# Altium PCB lathe_pcb.PcbDoc
Units mm, origin at the board's own origin, x right, y up, seen from the top; angles counter-clockwise.
Board outline 99.95 x 69.09 mm, 2 copper layers (Top Layer, Ground); 55 components, 34 nets, 170 pads, 21 vias.
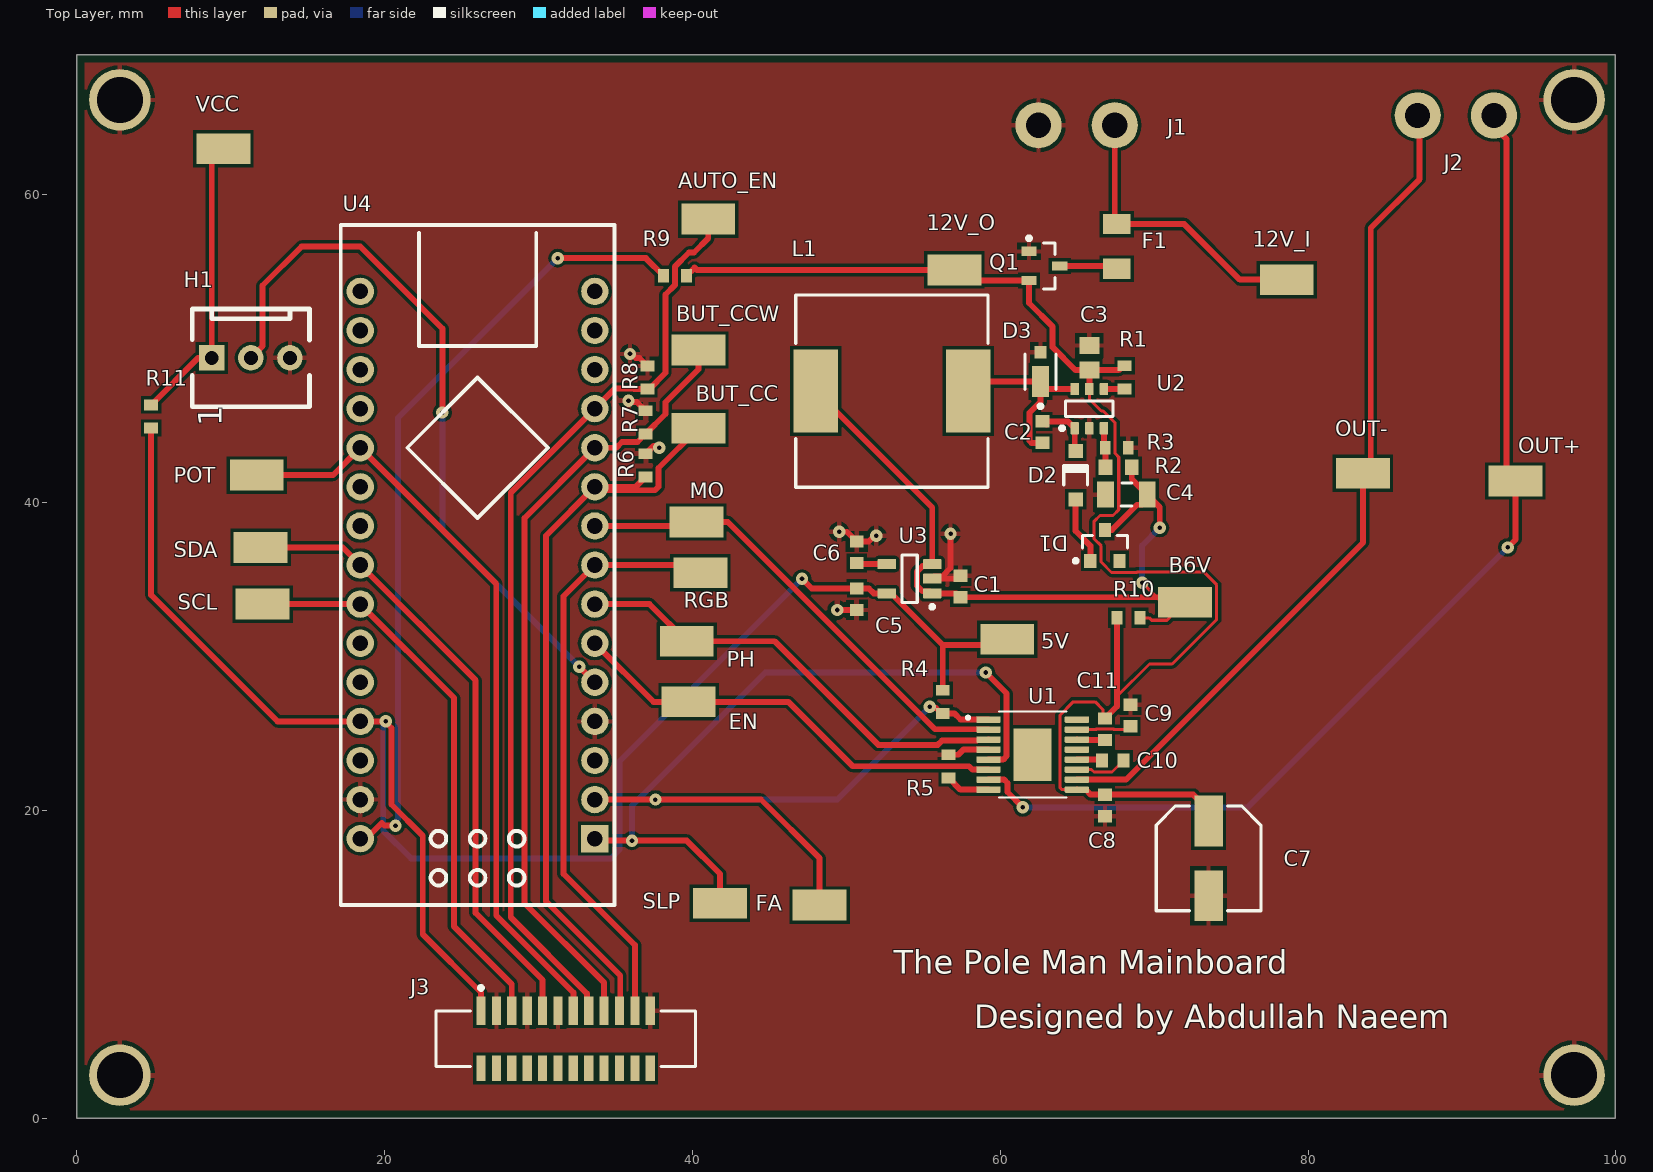
[diagram p0: Top Layer view]
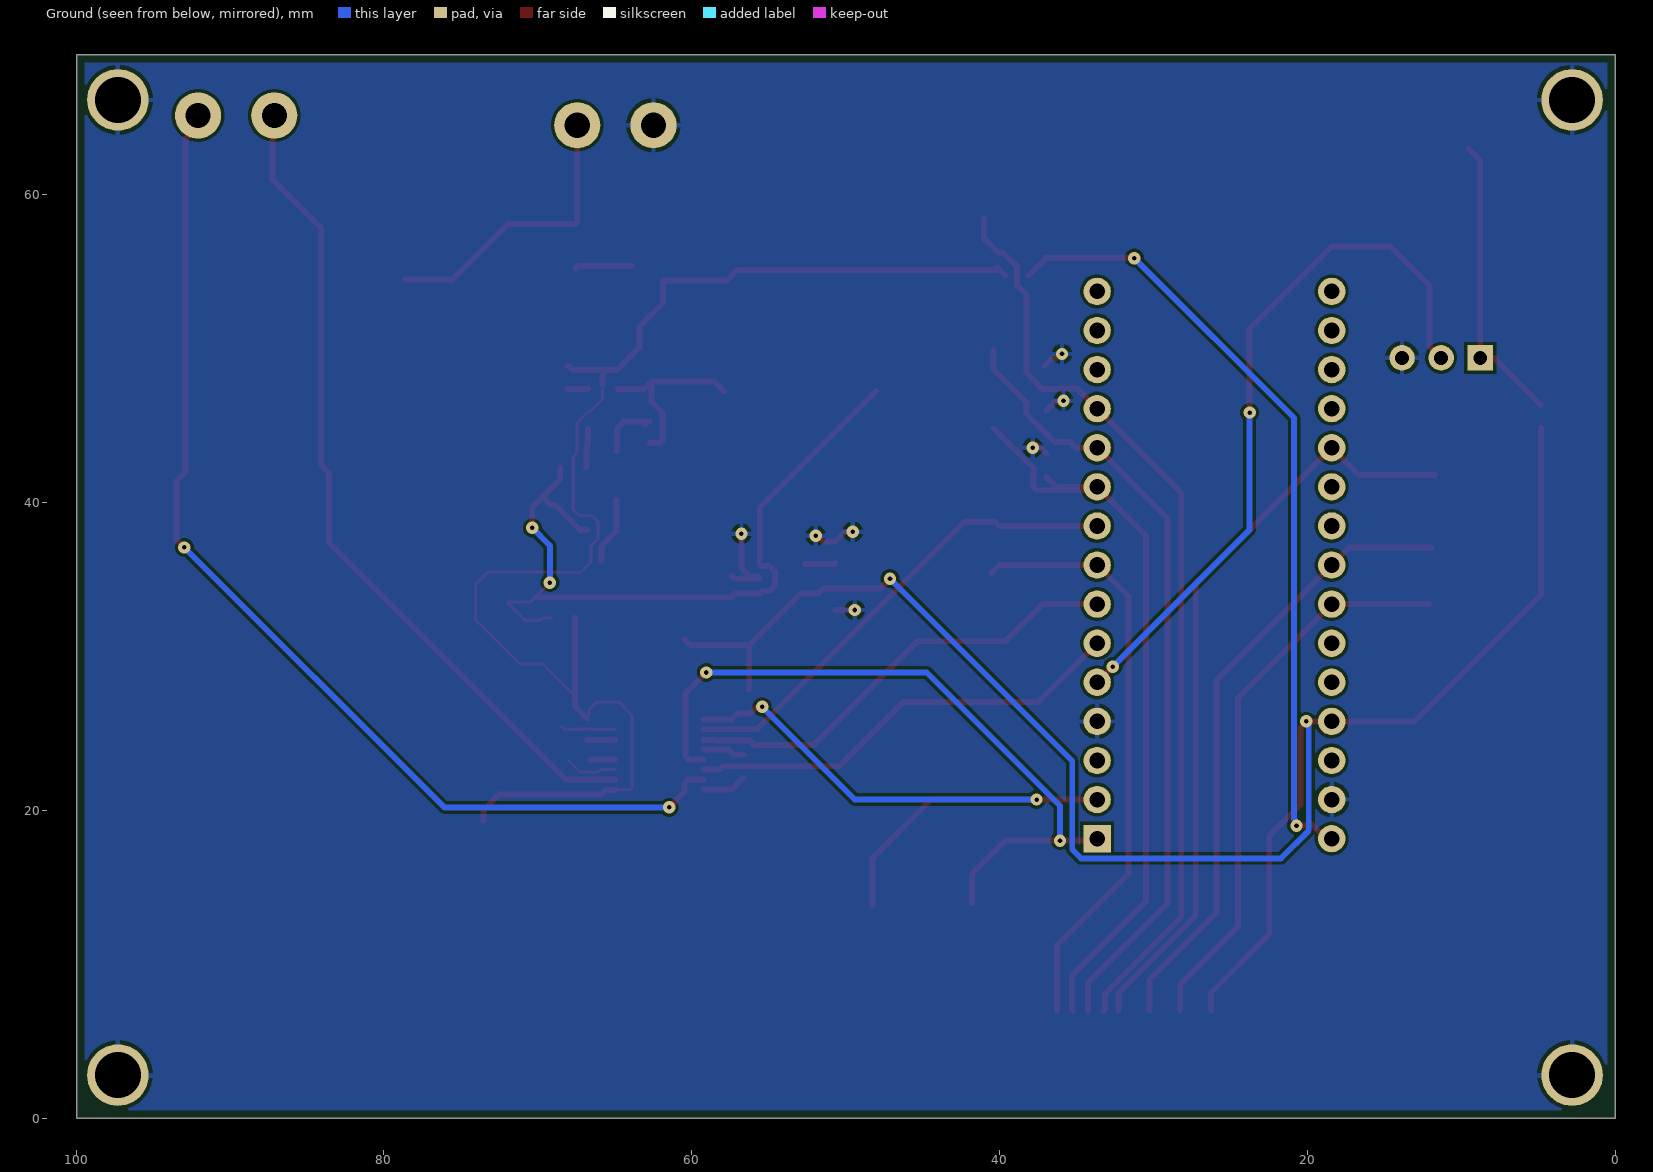
[diagram p1: Ground view, seen from below]

## Layer stack, top to bottom
Top Solder: solder mask 0.0102, Solder Resist, Dk 3.5
Top Layer: signal copper 0.009
Dielectric 1: dielectric 0.32, FR-4, Dk 4.8
Ground: signal copper 0.009
Bottom Solder: solder mask 0.0102, Solder Resist, Dk 3.5

## Board outline
0,0 0,69.088 99.949,69.088 99.949,0

## Design rules (kind name [scope] priority, off if disabled: settings)
BoardOutlineClearance [All] p1: gap=0.5 ignorepadtopadclearanceinfootprint=FALSE
Clearance GND_POLY [InNamedPolygon('GND')] p1: gap=0.254 ignorepadtopadclearanceinfootprint=FALSE
Clearance Min_Clearance_Circuit_Labs [All] p2: gap=0.2 ignorepadtopadclearanceinfootprint=FALSE
FanoutControl Fanout_BGA [IsBGA] p1 off: bgadir=Out bgaviamode=Centered fanoutstyle=Auto fanoutdirection=Alternating viagrid=0.025 // Fanout_BGA (Default Rule)
Height [All] p1: minheight=0 maxheight=50.8 prefheight=12.7
HoleSize [All] p1: absolutevalues=TRUE maxlimit=10 minlimit=0.3 maxpercent=80.000 minpercent=20.000
MinimumAnnularRing [All] p1: minimumring=0.1
MinimumSolderMaskSliver [All] p1: minsoldermaskwidth=0.102
NetAntennae [All] p1: netantennaetolerance=1
PolygonConnect [All] p1: connectstyle=Relief reliefconductorwidth=0.305 reliefentries=4 polygonreliefangle="90 Angle" airgapwidth=0.254
RoutingVias [All] p1: holewidth=0.5 width=1 viastyle="Through Hole" minholewidth=0.3 minwidth=0.8 maxholewidth=1 maxwidth=2
SMDNeckDown [All] p1 off: percent=50.000
SMDToCorner [All] p1: distance=98425
SMDToPlane [All] p1: distance=1968504
SilkToSolderMaskClearance SilkscreenOverComponentPads [IsPad] p1: minsilkscreentomaskgap=0.2 clearancetoexposedcopper=TRUE
SolderMaskExpansion [All] p1: expansion=0.102
ViasUnderSMD [All] p1: allowed=FALSE
Width [All] p1: maxlimit=2 minlimit=0.2 preferedwidth=0.3
24 further rules are at their usual default settings.

## Components (designator, comment, footprint, x,y, rotation, side; value= is the part's Value field where it differs from the comment)
5V "TP" TP_1206 60.452,31.115 r0 top
12V_I "TP" TP_1206 78.613,54.483 r0 top
12V_O "TP" TP_1206 57.023,55.118 r0 top
AUTO_EN "TP" TP_1206 41.021,58.42 r0 top
B6V "TP" TP_1206 72.009,33.528 r180 top
BUT_CC "TP" TP_1206 40.386,44.831 r0 top
BUT_CCW "TP" TP_1206 40.386,49.911 r0 top
C1 "1uF" CAPC1608L 57.404,34.544 r270 top
C2 "100nF" CAPC1608L 62.738,44.577 r270 top
C3 "10uF" CAPC2012L 65.786,49.403 r270 top
C4 "22uF" CAPC3216L 68.199,40.513 r0 top
C5 "2.2uF" CAPC1608L 50.673,33.717 r90 top
C6 "10nF" CAPC1608L 50.673,36.768 r270 top
C7 "100µF/25V" CAPAE6666X77M 73.533,16.879 r270 top
C8 "100nF" CAPC1608L 66.802,20.32 r90 top
C9 "220nF" CAPC1608L 68.453,26.162 r90 top
C10 "100nF" CAPC1608L 67.31,23.241 r180 top
C11 "100nF" CAPC1608L 66.802,25.273 r270 top
D1 "BZX84C4V3LT1G" ONSC-SOT-23-3-318-08_V 66.802,37.211 r90 top
D2 "1N4148W-7-F" DIOD-SOD123-2_V 64.897,41.783 r90 top
D3 "MSS1P3L-M3/89A" FP-96591-MFG 62.611,48.514 r90 top value=65pF
EN "TP" TP_1206 39.751,27.051 r0 top
F1 "1A" RESC3216N 67.564,56.642 r270 top value=2A
FA "TP" TP_1206 48.26,13.843 r0 top
H1 "3 Pin Molex KK Hdr" MOLEX_KK_3_HDR 8.763,49.403 r0 top
J1 "14 AWG" 14AWG_holes 67.437,64.516 r90 top
J2 "14 AWG" 14AWG_holes 92.075,65.151 r90 top
J3 "52610-1272" MOLX-52610-1272 31.758,5.11 r0 top
L1 "47.0 µH" WE-PD-L 52.959,47.244 r180 top
MO "TP" TP_1206 40.259,38.735 r0 top
OUT+ "TP" TP_1206 93.472,41.402 r0 top
OUT- "TP" TP_1206 83.566,41.91 r0 top
PH "TP" TP_1206 39.624,30.988 r0 top
POT "TP" TP_1206 11.684,41.783 r0 top
Q1 "SSM3J328R,LF" SOT23_L 62.865,55.372 r0 top
R1 "100K" RESC1608L 68.072,48.133 r90 top
R2 "47K" RESC1608N 67.691,42.291 r0 top
R3 "10K" RESC1608L 67.564,43.561 r180 top
R4 "10K" RESC1608L 56.261,27.051 r90 top
R5 "0R" RESC1608L 56.642,22.86 r270 top
R6 "10K" RESC1608L 36.957,42.418 r270 top
R7 "10K" RESC1608L 36.957,45.212 r270 top
R8 "10K" RESC1608L 37.084,48.121 r270 top
R9 "0R" RESC1608L 38.862,54.737 r0 top
R10 "0R" RESC1608L 68.326,32.512 r180 top
R11 "0R" RESC1608L 4.826,45.593 r270 top
RGB "TP" TP_1206 40.513,35.433 r0 top
SCL "TP" TP_1206 12.065,33.401 r0 top
SDA "TP" TP_1206 11.938,37.084 r0 top
SLP "TP" TP_1206 41.783,13.97 r0 top
U1 "DRV8800PWP" SOP65P640X120-17N 62.103,23.622 r0 top
U2 "LM2736YMK" DDC0006A_L 65.786,46.101 r90 top
U3 "LP2985-50DBVR" DBV0005A_M 54.102,35.052 r180 top
U4 "Arduino Nano" Arduino-nano 33.655,18.161 r180 top
VCC "TP" TP_1206 9.525,62.992 r0 top

## Footprints (in the part's own frame and the unit in brackets; to place one, negate y for a bottom-side part, rotate by r counter-clockwise, add the part's x,y. Pads: shape width x height; smd on the part's side, far side on the other; paste and mask are expansions set on the pad)
14AWG_holes [mm]
  round 3 hole 1.628: 1(0,0) 2(0,4.953)
Arduino-nano [mil]
  rect 70x70 hole 40: 1(0,0)
  round 70 hole 40: 2(0,-100) 3(0,-200) 4(0,-300) 5(0,-400) 6(0,-500) 7(0,-600) 8(0,-700) 9(0,-800) 10(0,-900) 11(0,-1000) 12(0,-1100) 13(0,-1200) 14(0,-1300) 15(0,-1400) 16(600,-1400) 17(600,-1300) 18(600,-1200) 19(600,-1100) 20(600,-1000) 21(600,-900) 22(600,-800) 23(600,-700) 24(600,-600) 25(600,-500) 26(600,-400) 27(600,-300) 28(600,-200) 29(600,-100) 30(600,0)
  silkscreen extent -50,-1570 650,170, body extent -50,-1450 650,50, height 10
CAPAE6666X77M [mm] "Aluminum Electrolytic Capacitor, Body 6.60x6.60x7.70mm, IPC Low Density"
  rect 3.3x1.85 smd: 1(2.425,0) 2(-2.425,0)
  silkscreen extent -3.4,-3.4 3.4,3.4, body extent -3.4,-3.4 3.4,3.4, height 7.7
CAPC1608L [mm] "Chip Capacitor, Body 1.6x0.8mm, IPC High Density"
  rect 0.8x0.9 smd: 1(-0.7,0) 2(0.7,0)
  body extent -0.87,-0.48 0.87,0.48, height 0.85
CAPC2012L [mm] "Chip Capacitor, Body 2.0x1.3mm, IPC High Density"
  rect 1.1x1.3 smd: 1(-0.8,0) 2(0.8,0)
  body extent -1.1,-0.72 1.1,0.72, height 1.1
CAPC3216L [mm] "Chip Capacitor, Body 3.2x1.6mm, IPC High Density"
  rect 1.1x1.7 smd: 1(-1.35,0) 2(1.35,0)
  silkscreen extent -0.35,-0.75 0.35,0.75, body extent -1.7,-0.9 1.7,0.9, height 1.35
DBV0005A_M [mm] "SOT23, 5-Leads, Body 3.05x1.75mm, Pitch 0.95mm, IPC Low Density"
  rrect15% 1.2x0.65 smd: 1(-1.475,0.95) 2(-1.475,0) 3(-1.475,-0.95) 4(1.475,-0.95) 5(1.475,0.95)
  silkscreen extent -1.6,-1.55 0.5,1.95, body extent -1.42,-1.46 1.42,1.46, height 1.08
DDC0006A_L [mm] "SOT23, 6-Leads, Body 3.05x1.75mm, Pitch 0.95mm, IPC High Density"
  rrect18% 0.8x0.55 smd: 1(-1.275,0.95) 2(-1.275,0) 3(-1.275,-0.95) 4(1.275,-0.95) 5(1.275,0) 6(1.275,0.95)
  silkscreen extent -1.4,-1.55 0.5,1.9, body extent -1.43,-1.48 1.43,1.49, height 0.9
DIOD-SOD123-2_V [mm] "SOD123, 2-Leads, Body 2.7x1.55mm, Height 1.45mm"
  rect 0.9x0.95 smd: 1(-1.575,0) 2(1.575,0)
  silkscreen extent -0.64,-0.82 0.64,0.77, body extent -1.35,-0.77 1.35,0.77, height 1.45
FP-96591-MFG [mm]
  rect 2x1.1 smd paste+0 mask+0: 1(-0.65,0)
  rect 0.8x0.8 smd paste+0 mask+0: 2(1.25,0)
  silkscreen extent -2.37,-1 1.15,1, body extent -1.75,-0.8 1.75,0.8, height 0.25
MOLEX_KK_3_HDR [mil] "MOLEX_KK_3_HDR"
  rect 65x65 hole 35.43: 1(0,0)
  round 65 hole 35.43: 2(100,0) 3(200,0)
  silkscreen extent -50,-125 250,125, body extent -50,-114 250,114, height 461
MOLX-52610-1272 [mm] "FPC Connector, 12-Leads, Vertical, Pitch 1.0 mm, Mated Height 5.75 mm, SMT"
  rect 0.6x1.85 smd: 1A(-5.5,1.875) 2A(-4.5,1.875) 3A(-3.5,1.875) 4A(-2.5,1.875) 5A(-1.5,1.875) 6A(-0.5,1.875) 7A(0.5,1.875) 8A(1.5,1.875) 9A(2.5,1.875) 10A(3.5,1.875) 11A(4.5,1.875) 12A(5.5,1.875)
  rect 0.6x1.65 smd: 1B(-5.5,-1.875) 2B(-4.5,-1.875) 3B(-3.5,-1.875) 4B(-2.5,-1.875) 5B(-1.5,-1.875) 6B(-0.5,-1.875) 7B(0.5,-1.875) 8B(1.5,-1.875) 9B(2.5,-1.875) 10B(3.5,-1.875) 11B(4.5,-1.875) 12B(5.5,-1.875)
  silkscreen extent -8.43,-1.75 8.43,3.47, body extent -9.3,-2.24 9.3,2.26, height 5.76
ONSC-SOT-23-3-318-08_V [mm] "SOT23, 3-Leads, Body 2.92x1.3mm, Pitch 0.95mm"
  rect 0.9x0.8 smd: 1(-1,0.95) 2(-1,-0.95) 3(1,0)
  silkscreen extent -1.12,-1.46 0.65,2.02, body extent -0.65,-1.46 0.65,1.46, height 1.11
RESC1608L [mm] "Chip Resistor, Body 1.6x0.8mm, IPC High Density"
  rect 0.7x0.9 smd: 1(-0.75,0) 2(0.75,0)
  body extent -0.85,-0.48 0.85,0.48, height 0.9
RESC1608N [mm] "Chip Resistor, Body 1.6x0.8mm, IPC Medium Density"
  rect 0.9x1 smd: 1(-0.85,0) 2(0.85,0)
  body extent -0.85,-0.48 0.85,0.48, height 0.6
RESC3216N [mm] "Chip Resistor, Body 3.2x1.6mm, IPC Medium Density"
  rect 1.3x1.8 smd: 1(-1.45,0) 2(1.45,0)
  body extent -1.68,-0.87 1.68,0.87, height 0.71
SOP65P640X120-17N [mm]
  rrect25% 1.57x0.41 smd: 1(-2.87,2.275) 2(-2.87,1.625) 3(-2.87,0.975) 4(-2.87,0.325) 5(-2.87,-0.325) 6(-2.87,-0.975) 7(-2.87,-1.625) 8(-2.87,-2.275) 9(2.87,-2.275) 10(2.87,-1.625) 11(2.87,-0.975) 12(2.87,-0.325) 13(2.87,0.325) 14(2.87,0.975) 15(2.87,1.625) 16(2.87,2.275)
  rect 2.48x3.4 smd paste-3: 17(0,0)
  silkscreen extent -4.3,-2.8 2.2,2.8
SOT23_L [mm] "SOT23, 3-Leads, Body 2.9x1.3mm, Pitch 0.95mm, Lead Span 2.3mm, IPC High Density"
  rect 1x0.6 smd: 1(-1,0.95) 2(-1,-0.95) 3(1,0)
  silkscreen extent -1.12,-1.5 0.7,1.92, body extent -0.7,-1.5 0.7,1.5, height 1.1
TP_1206 [mm] "Test Point Pad"
  rect 3.5x2 smd: 1(0,0)
  body extent -1.62,-0.85 1.63,0.8, height 2
WE-PD-L [mm] "SMD Inductor, 2-Leads, Body 12.0 x 12.0 mm"
  rect 2.9x5.4 smd: 1(-4.95,0) 2(4.95,0)
  silkscreen extent -6.25,-6.25 6.25,6.25, body extent -6,-6 6,6, height 5.98

## Part data
5V 12V_I 12V_O AUTO_EN B6V BUT_CC BUT_CCW EN FA MO OUT+ OUT- PH POT RGB SCL SDA SLP VCC: library part TP_1206, "Test-Point 3.3x1.6x2.1mm SMD", Manufacturer="Harwin Inc", Manufacturer Part Number=S1751-46R, Supplier Part Number 1=952-1478-2-ND, Mounting Type="Surface Mount", Storage Location=ProtoPlace, Supplier="ECE Dept", Supplier 1=Digi-Key, Supplier 2=Farnell, Supplier Part Number 2=1826282, Type="PC Test Point"
C1: library part CC_1uF_0603, "CAP CER 1uF Y5V -20% +80% 16V 0603", Max Voltage=16V, Code_IPC="1608 [0603]", PackageReference=0603, Storage Location="PCB Assembly WS", Supplier="ECE Dept"
C2 C8 C10 C11: library part CC_100nF_0603, "CAP CER 100nF X7R +-10% 50V 0603", Code_IPC="1608 [0603]", PackageReference=0603, Storage Location="PCB Assembly WS", Supplier="ECE Dept"
C3: library part CC_10uF_0805_16V, "CAP CER 10uF X5R 16V 0805", Manufacturer="Samsung Electro-Mechanics", Manufacturer Part Number=CL21A106KOQNNWE, Max Voltage=16V, Operating Temperature="-55°C ~ 85°C", Package / Case="0805 (2012 Metric)", Ratings=-, Supplier Part Number 1=1276-2894-1-ND, Temperature Coefficient=X5R, Tolerance=±10%, Applications="General Purpose", Category=Capacitors, Code_IPC=2012[0805], ComponentLink1Description=http://www.samsungsem.com/kr/support/product-search/mlcc/CL21A106KOQNNWE.jsp, ComponentLink1URL=http://www.samsungsem.com/kr/support/product-search/mlcc/CL21A106KOQNNWE.jsp, Features=-, Height - Seated (Max)=-, Lead Spacing=-, Lead Style=-, Mounting Type="Surface Mount, MLCC", Note="Footprint corresponds to dimensions for bulk cassette packaging. This case size has tightened tolerances.", Notification="Current market demand for these product types have resulted in fluctuating and extending lead times. Lead times may differ.", PackageReference=0805, Packaging="Cut Tape (CT)", Part Status=Active, Pricing 1="1=0.35, 10=0.25, 100=0.1178, 500=0.08254, 1000=0.06831 (NZD)", RoHS="RoHS Compliant", Size / Dimension="0.079\" L x 0.049\" W (2.00mm x 1.25mm)", Stock 1=20000, Supplier 1=Digi-Key, Thickness (Max)="0.055\" (1.40mm)", Voltage - Rated=16V
C4: library part CC_22uF_1206, "CAP CER 22uF Y5V -20% +80% 10V 1206", Dielectric=Y5V, Max Voltage=10V, Storage Location="PCB Assembly WS", Supplier="ECE Dept"
C5: library part CC_2.2uF_0603, "CAP CER 2.2uF X5R +-20% 10V 0603", Max Voltage=10V, Code_IPC="1608 [0603]", PackageReference=0603, Storage Location="PCB Assembly WS", Supplier="ECE Dept"
C6: library part CC_10nF_0603, "CAP CER 10nF X7R +-10% 50V 0603", Code_IPC="1608 [0603]", PackageReference=0603, Storage Location="PCB Assembly WS", Supplier="ECE Dept"
C7: library part CA_100uF_25V, "CAP ALUM 100UF 25V 20% SMD", Manufacturer=Nichicon, Manufacturer Part Number=UWT1E101MCL1GS, Operating Temperature="-55°C ~ 105°C", Package / Case="Radial, Can - SMD", Ripple Current=91mA, Supplier Part Number 1=493-2190-1-ND, Capacitance=100µF/25V, Height - Seated (Max)="0.303\" (7.70mm)", Mounting Type="Surface Mount", Size / Dimension="0.248\" Dia (6.30mm)", Supplier 1=Digi-Key
C9: library part CC_220nF_0603, "CAP CER 220nF Y5V -20% +80% 25V 0603", Code_IPC="1608 [0603]", MoV=25V, PackageReference=0603, Storage Location="PCB Assembly WS", Supplier="ECE Dept"
D1: library part CMP-1060-01162-1, "Zener Voltage Regulator, 225 mW, 3-Pin SOT-23, Pb-Free, Tape and Reel", Manufacturer="On Semiconductor", ComponentLink1Description="Manufacturer URL", ComponentLink1URL=http://www.onsemi.com/, ComponentLink2Description=Datasheet, ComponentLink2URL=http://www.onsemi.com/pub_link/Collateral/BZX84C2V4LT1-D.PDF, ComponentLink3Description="Package Specification", ComponentLink3URL=http://www.onsemi.cn/pub_link/Collateral/318-08.PDF, DatasheetVersion="Rev. 17", Mounting Technology="Surface Mount", PackageDescription="3-Pin Small Outline Transistor, Body 2.92 x 1.3 mm, Pitch 0.95 mm", PackageReference=SOT-23-3-318-08, PackageVersion="Rev. AP, 11/2009", Packing="Tape and Reel", PartNumber=BZX84C4V3LT1G, RoHS=Pb-Free
D2: library part CMP-2000-04932-2, "Fast Switching Diode, 100 V, 0.15 A, -65 to 150 degC, 2-Pin?SOD123, RoHS, Tape and Reel", If - Forward Current=0.15A, Ir - Reverse Current=1uA, Manufacturer=DiodesIncorporated, Max Surge Current=2A, Maximum Operating Temperature=+150C, Minimum Operating Temperature=-65C, Operating Temperature Range=-65Cto+150C, Package / Case=SOD-123, Package Reference=SOD123-2, Peak Reverse Voltage=100V, Vf - Forward Voltage=1.25V, Brand=DiodesIncorporated, Configuration=Single, Datasheet URL=http://www.farnell.com/datasheets/1915529.pdf, Datasheet Version="Rev. 24-2, 10/2013", Factory Pack Quantity=3000, Height=1.25mm, Length=2.85mm, Manufacturer URL=http://www.diodes.com/, Mounting Style=SMD/SMT, Package URL=http://www.diodes.com/datasheets/ds18004.pdf, Packaging=Reel, Product=SwitchingDiodes, Product Category=Diodes-GeneralPurpose,Power,Switching, Recovery Time=4ns, RoHS=True, Series=1N4148, Type=SwitchingDiode, Unit Weight=0.000353oz, Width=1.7mm
D3: library part CMP-02539-000006-1, "DIODE SCHOTTKY 30V 1A MICROSMP", Capacitance=65pF, Forward Current=1A, Manufacturer=Vishay, Max Junction Temp=+150°C, Max Repetitive Reverse Voltage=30V, Max Surge Forward Current=25A, Package=96591, Peak Reverse Current=15uA, Temperature="-55°C to +150°C", Temperature Range Low=-55°C, Automotive=No, Category=Diode, ComponentLink2Description=Datasheet, ComponentLink2URL=http://www.vishay.com/docs/89020/mss1p3l.pdf, Device Class L1="Discrete Semiconductors", Device Class L2=Diodes, Device Class L3="Schottky Diodes", Digikey Description="DIODE SCHOTTKY 30V 1A MICROSMP", Footprint Url=http://www.vishay.com/docs/96591/microsmp_do-219ad_fredpt.pdf, Height=0.73mm, Lead Free=Yes, Manufacturer Part Number=MSS1P3L-M3/89A, Mouser Description="Schottky Diodes & Rectifiers 1.0 Amp 30 Volt", Octopart=https://octopart.com/mss1p3l-m3%2F89a-vishay-42670898, RoHS=TRUE, Temperature Range High=+150°C
F1: library part FS_Fuse_2.0A, "Fuse 2.0A Very Fast Acting 1206 SMD", Manufacturer=MULTICOMP, Manufacturer Part Number="MC12CF 002", Supplier Part Number 1=1841029, Manufacturer PN="MC12CF 002", Storage Location="PCB Assembly WS", Supplier="ECE Dept", Supplier 1=Farnell
H1: library part JA_MOLEX_KK_3POS, "CONN HEADER 3POS 2.54mm VERT_Thru Hole", Manufacturer=Molex, Manufacturer PN=22-23-2031, Supplier Part Number 1=9731156, Storage Location="ECE Dept Store", Supplier="ECE Dept", Supplier 1=Farnell
J1 J2: library part 14AWG_holle
J3: library part CMP-1241-00323-1, "1.0 mm Pitch Easy-On(TM) Type FPC Connector, 5.75 mm Mated Height, Vertical, ZIF, SMT, 12 Circuits, -40 to 85 degC, ELV and RoHS Compliant, Tape and Reel", Current (Max per Contact)=1A, Manufacturer=Molex, Voltage (Max)="125V AC (RMS)/DC", Circuits (Loaded)=12, ComponentLink1Description="Manufacturer URL", ComponentLink1URL=http://www.molex.com/molex/index.jsp, ComponentLink2Description=Datasheet, ComponentLink2URL=http://www.molex.com/webdocs/datasheets/pdf/en-us/0526101272_FFC_FPC_CONNECTORS.pdf, ComponentLink3Description="Package Specification", ComponentLink3URL=http://www.molex.com/pdm_docs/sd/526101272_sd.pdf, Contact Position=N/A, Durability (mating cycles max)=30, Entry Angle=Vertical, Mated Height=5.75mm, Material - Metal="Phosphor Bronze", Material - Plating Mating=Gold, Material - Plating Termination=Tin, Mounting Technology="Surface Mount", Number of Rows=1, Orientation=Vertical, PackageDescription="12-Lead FPC Connector, Pitch 1.0 mm", PackageReference=52610-1272, PackageVersion="Rev. G, 02/2012", Packing="Tape and Reel", PartNumber=52610-1272, PCB Locator=No, PCB Retention=None, Pitch - Mating Interface=1.00mm, Polarized to PCB=No, RoHS=TRUE, Stackable=No
L1: library part CMP-0227-00728-1, "SMD-Shielded Power Inductor WE-PD, L = 47.0 µH", ComponentLink1Description="Manufacturer Link", ComponentLink1URL=http://www.we-online.com, ComponentLink2Description=Datasheet, ComponentLink2URL=http://www.we-online.de/katalog/media/pdf/744771147.pdf, DatasheetVersion="ver 6, Jun-2005", Inductance="47.0 µH", PackageDescription="SMD Inductor, 2-Leads, Body 12.0 x 12.0 mm", PackageReference=WE-PD-L, PackageVersion=2006
Q1: library part TM_SSM3J328R, "MOSFET P-CH 20V 6A SOT23-3", Case/Package=SOT-23-3, Continuous Drain Current (ID)=6A, Drain to Source Breakdown Voltage=-20V, Drain to Source Resistance=47.4mR, Drain to Source Voltage (Vdss)=20V, Gate to Source Voltage (Vgs)=8V, Input Capacitance=840pF, Input Capacitance (Ciss) @ Vds="840pF @ 10V", Manufacturer=Toshiba, Max Operating Temperature=150°C, Max Power Dissipation=1W, Min Operating Temperature=-55°C, Package / Case="SOT-23-3 Flat Leads", Package Quantity=3000, Power Dissipation=2W, Supplier Device Package=SOT-23F, Supplier Part Number=SSM3J328RLFDKR-ND, ComponentLink1Description=https://datasheet.ciiva.com/11158/ssm3j328r-datasheet-en-20140301-11158652.pdf, ComponentLink1URL=https://datasheet.ciiva.com/11158/ssm3j328r-datasheet-en-20140301-11158652.pdf, Current - Continuous Drain (Id) @ 25° C=6A, Element Configuration=Single, FET Feature="Logic Level Gate, 1.5V Drive", FET Type="MOSFET P-Channel, Metal Oxide", Gate Charge (Qg) @ Vgs="12.8nC @ 4.5V", Manufacturer Part Number=SSM3J328R,LF, Mount="Surface Mount", Number of Channels=1, Number of Elements=1, Number of Pins=3, Packaging="Tape and Reel", Power - Max=1W, Pricing="1=0.79, 10=0.658, 25=0.5772, 100=0.4939, 250=0.42836, 500=0.36284, 1000=0.27972 (NZD)", Radiation Hardening=No, Rds On Max=29.8mR, Storage Location="PCB Assembly WS", Supplier=Digi-Key, Supplier 1=Digi-Key, Supplier Part Number 1=SSM3J328RLFDKR-ND, Turn-Off Delay Time=107ns, Turn-On Delay Time=32ns, Vgs(th) (Max) @ Id="1V @ 1mA"
R1: library part RS_100K, "RES 100K OHM 1/10W 5% 0603 SMD", Storage Location="PCB Assembly WS", Supplier="ECE Dept"
R2: library part RS_47K, "RES 47.0K OHM 1/10W 5% 0603 SMD", Storage Location="PCB Assembly WS", Supplier="ECE Dept"
R3 R4 R6 R7 R8: library part RS_10K, "RES 10.0K OHM 1/10W 5% 0603 SMD", Storage Location="PCB Assembly WS", Supplier="ECE Dept"
R5 R9 R10 R11: library part RS_0R0, "RES 0.0 OHM 1/10W 5% 0603 SMD", Storage Location="PCB Assembly WS", Supplier="ECE Dept"
U1: "IC MTR DRV BIPOLR 8-38V 16HTSSOP"
U2: library part CMP-0069-01247-3, "750mA Load Step-Down DC-DC Regulator, 6-pin Tiny SOT23", Manufacturer="Texas Instruments", PackageTopMarking=SHBB*XTT, PowerWise=N, Code_IPC=SOT26A-6, Code_JEDEC=MO-193-AA, ComponentLink1Description="Datasheet URL", ComponentLink1URL=http://www.ti.com/general/docs/lit/getliterature.tsp?genericPartNumber=LM2736&fileType=pdf, CompType=Switcher, PackageDescription="Molded TSOT, 2.97 x 1.65 x 0.87mm Body, 6 Lead, 0.95mm Pitch", PackageReference=DDC0006A, PinCount=6, RoHS=N
U3: "Single Output Low Noise LDO, 150 mA, Fixed 5 V Output, 1.5% Tolerance, 2.2 to 16 V Input, Low IQ, 5-Pin SOT-23 (DBV), -40 to 125 degC, Green (RoHS & no Sb/Br), Tape and Reel", Manufacturer="Texas Instruments", Operating Temperature Range (degC)="-40 to 125", Accuracy (%)=1.5, ComponentLink1Description="Manufacturer URL", ComponentLink1URL=http://www.ti.com/, ComponentLink2Description=Datasheet, ComponentLink2URL=http://www.ti.com/lit/ds/symlink/lp2985-50.pdf, ComponentLink3Description="Package Specification", ComponentLink3URL=http://www.ti.com/litv/pdf/mpds018j, DatasheetVersion=SLVS522N, Fixed Output Options (V)=5, Iout (Max) (A)=0.15, Iq (Typ) (mA)=0.85, Mounting Technology="Surface Mount", Output Options="Fixed Output", PackageDescription="5-Pin Plastic Small Outline, Body 2.9 x 1.6 mm, Pitch 0.95 mm", PackageReference=DBV0005A, PackageVersion=4073253-4/L, Packing="Tape and Reel", PartNumber=LP2985-50DBVR, RoHS=TRUE, Vdo (Typ) (mV)=280, Vin (V)="2.2 to 16"

## Free pads (board coordinates)
  round 4 hole 3: 2(2.794,2.794) 2(2.794,66.167) 2(97.282,2.794) 2(97.282,66.167)

## Via types
v1: diameter 0.8, hole 0.3, Top Layer to Ground, 21 vias

## Nets (pads, with @x,y where several pads share a name; then routed paths per layer and width w, separated by ;. In a path a pad name is that pad's centre, name@x,y a point inside that pad or via, vN(x,y) a via of type N, cw(c..) or ccw(c..) an arc to the next point about the centre after c; other vN are vias at no path point)
5V: 5V.1 C5.2 J3.1A R4.2 R11.2 U3.5 U4.27 | length 115.1
  Top Layer w0.381: R11.2 4.826,33.99 13.035,25.781 U4.27 v1(20.066,25.781) 20.066,25.73 20.447,25.348 20.447,20.382 22.476,18.353 22.476,11.941 26.258,8.159 J3.1A ; v1(47.117,35.052) 47.752,34.417 51.462,34.417 51.777,34.102 52.902,34.102 56.261,30.743 ; R4.2 56.261,30.743 ; 5V.1 60.08,30.743 56.261,30.743
  Ground w0.381: v1(20.066,25.781) 20.066,25.668 19.91,25.512 19.91,18.682 21.711,16.882 34.706,16.882 35.277,17.453 35.277,23.213 v1(47.117,35.052)
"12 V": 12V_O.1 C3.2 C7.2 C8.2 C11.1 Q1.2 R1.2 R9.2 R10.2 U1.9 U2.5 | length 93.4
  Top Layer w0.2: U1.9 64.005,21.347 63.888,21.464 63.888,26.196 64.743,27.051 66.167,27.051 66.662,26.556 66.662,26.273 66.741,26.195 67.023,26.195 C11.1 ; U2.5 65.786,46.726 66.565,45.947 66.685,45.947 67.464,45.168 67.464,43.187 67.699,42.952 67.699,39.539 67.322,39.162 66.479,39.162 66.102,38.785 66.102,37.637 66.552,37.187 66.552,36.137 67.228,35.461 68.888,35.461 68.925,35.498 73.213,35.498 74.059,34.652 74.059,32.404 71.169,29.513 69.692,29.513 67.576,27.397
  Top Layer w0.381: R9.2 40.139,55.264 40.284,55.118 12V_O.1 57.719,54.422 Q1.2 61.865,52.968 63.401,51.432 63.401,50.088 64.886,48.603 C3.2 ; U1.9 64.987,21.333 65.567,21.333 65.88,21.02 72.542,21.02 73.533,20.029 C7.2 ; U2.5@65.786,47.656 C3.2 ; C11.1 67.023,26.195 67.576,26.747 67.576,27.397 R10.2 ; R1.2 67.972,48.883 67.692,48.603 C3.2
AUTO_EN: AUTO_EN.1 J3.8A R8.2 U4.12 | length 60.4
  Top Layer w0.381: J3.8A 33.148,7.095 33.148,8.091 28.194,13.046 28.194,40.64 U4.12 34.957,47.403 36.173,47.403 36.205,47.371 37.184,47.371 38.245,48.433 38.245,53.518 38.852,54.125 38.852,55.33 39.772,56.25 40.101,56.25 41.021,57.17 AUTO_EN.1
BUT_CC: BUT_CC.1 J3.10A R6.2 U4.10 | length 50.1
  Top Layer w0.381: J3.10A 35.306,7.033 35.306,9.271 30.48,14.097 30.48,37.846 U4.10 ; R6.2 36.31,41.021 U4.10 ; BUT_CC.1 37.797,42.243 37.797,41.029 37.569,40.801 33.875,40.801 U4.10
BUT_CCW: BUT_CCW.1 J3.9A R7.2 U4.11 | length 51.2
  Top Layer w0.381: J3.9A 34.258,8.795 29.083,13.97 29.083,38.989 U4.11 35.044,43.561 35.419,43.935 36.43,43.935 R7.2 38.245,45.75 38.245,46.521 40.386,48.661 BUT_CCW.1
EN: EN.1 U1.6 U4.6 | length 29
  Top Layer w0.381: U4.6 37.465,27.051 EN.1 46.228,27.051 50.409,22.869 57.971,22.869 58.194,22.647 U1.6
GND: C1.1 C3.1 C4.1 C5.1 C6.1 C7.1 C8.1 C9.2 D3.2 H1.3 J1.2 J3.2A J3.4A J3.6A J3.12A pad.2 Q1.1 R3.1 R5.1 R6.1 R7.1 R8.1 U1.4 U2.2 U3.2 U4.4 U4.29 | length 16.9
  Top Layer w0.381: v1(35.846,46.612) 35.926,46.532 36.387,46.532 R7.1 ; v1(35.941,49.657) 36.054,49.657 36.314,49.398 36.557,49.398 R8.1 ; R6.1 37.484,43.695 37.503,43.695 37.556,43.641 37.766,43.641 v1(37.846,43.561) ; v1(49.403,33.02) 49.406,33.017 C5.1 ; v1(49.53,38.1) 50.041,38.1 C6.1 51.452,37.468 51.83,37.846 v1(51.943,37.846) ; R5.1 57.265,23.61 57.602,23.947 U1.4 ; v1(56.769,37.973) 56.769,35.746 56.21,35.187 55.711,35.187 U3.2 57.212,35.052 C1.1
  Ground w0.381: v1@35.878,49.593 v1(35.941,49.657) ; v1(49.403,33.02) v1@49.467,33.084 ; v1@49.467,38.036 v1(49.53,38.1) ; v1(51.943,37.846) v1@52.007,37.91 ; v1@56.706,37.91 v1(56.769,37.973)
MODE: MO.1 U1.2 U4.9 | length 31.3
  Top Layer w0.381: U4.9 40.005,38.481 MO.1 42.291,38.735 55.753,25.273 59.207,25.273 U1.2
Net12V_I_1: 12V_I.1 F1.1 J1.1 | length 19
  Top Layer w0.381: J1.1 67.437,58.219 F1.1 71.956,58.092 75.565,54.483 12V_I.1
NetB6V_1: B6V.1 C1.2 C4.2 D1.3 L1.2 R2.2 R10.1 U3.1 U3.3 | length 51.8
  Top Layer w0.2: R10.1 69.676,32.512 69.837,32.351 70.832,32.351 B6V.1 70.485,33.528 70.169,33.844 v1(69.215,34.798)
  Top Layer w0.381: L1.2 55.577,39.676 U3.3 55.442,35.868 54.944,35.868 54.586,35.51 54.586,34.594 54.944,34.237 55.442,34.237 U3.1 57.146,34.102 C1.2 70.169,33.844 ; D1.3 67.247,38.211 68.889,39.854 69.189,39.854 69.549,40.213 C4.2 ; R2.2 68.541,41.521 C4.2 ; v1(70.358,38.354) 70.358,39.704 C4.2
  Ground w0.381: v1(69.215,34.798) 69.215,37.211 v1(70.358,38.354)
NetC2_1: C2.1 D2.2 U2.1 | length 4.1
  Top Layer w0.381: C2.1@62.997,45.067 62.788,45.277 C2.1 64.375,45.277 64.38,45.282 U2.1 64.836,43.419 D2.2
NetC2_2: C2.2 D3.1 L1.1 U2.6 | length 12.4
  Top Layer w0.381: L1.1 58.529,47.864 D3.1 ; C2.2 62.038,43.877 61.897,44.018 61.897,45.839 62.611,46.552 D3.1 ; U2.6 63.099,47.376 D3.1
NetC6_2: C6.2 U3.4 | length 2
  Top Layer w0.381: C6.2 50.739,36.002 U3.4
NetC9_1: C9.1 U1.15 | length 3.6
  Top Layer w0.2: U1.15 66.202,25.247 66.228,25.273 67.376,25.273 67.402,25.247 68.238,25.247 C9.1
NetC10_1: C10.1 U1.11 | length 3.4
  Top Layer w0.2: U1.11 65.929,22.647 66.086,22.491 67.26,22.491 C10.1
NetC10_2: C10.2 U1.12 | length 1.7
  Top Layer w0.381: U1.12 66.554,23.297 C10.2
NetC11_2: C11.2 U1.14 | length 1.8
  Top Layer w0.381: U1.14 64.997,24.573 C11.2
NetD1_1: D1.1 D2.1 | length 4.4
  Top Layer w0.381: D2.1 64.897,38.148 65.852,37.193 D1.1
NetF1_2: F1.2 Q1.3 | length 3.8
  Top Layer w0.381: Q1.3 67.384,55.372 F1.2
NetR1_1: R1.1 U2.4 | length 1.3
  Top Layer w0.381: U2.4 66.743,47.383 R1.1
NetR2_1: R2.1 R3.2 U2.3 | length 2.6
  Top Layer w0.381: U2.3 66.736,43.881 66.814,43.803 R3.2 66.827,43.547 66.827,42.305 R2.1
NetR5_2: R5.2 U1.8 | length 2.9
  Top Layer w0.381: R5.2 57.405,21.347 U1.8
NetR9_1: R9.1 U4.30 | length 51.4
  Top Layer w0.381: U4.30 18.793,18.161 19.254,18.622 19.257,18.622 19.812,19.177 19.979,19.01 v1(20.701,19.01) ; v1(31.242,55.88) 36.969,55.88 R9.1
  Ground w0.381: v1(20.701,19.01) 20.781,19.09 20.781,19.367 20.856,19.443 20.856,45.495 v1(31.242,55.88)
nFAULT: FA.1 R4.1 U1.1 U4.2 | length 43.7
  Top Layer w0.381: U4.2 v1(37.592,20.701) 44.45,20.701 48.26,16.891 FA.1 ; v1(55.418,26.726) 55.498,26.646 55.816,26.646 56.161,26.301 57.011,26.301 57.415,25.897 U1.1
  Ground w0.381: v1(37.592,20.701) 49.403,20.701 55.418,26.716 v1(55.418,26.726)
nSLEEP: SLP.1 U1.5 U4.1 | length 47.1
  Top Layer w0.381: U4.1 33.782,18.034 v1(36.068,18.034) 39.624,18.034 41.783,15.875 SLP.1 ; v1(59.055,28.956) 60.408,27.603 60.408,23.52 60.185,23.297 U1.5
  Ground w0.381: v1(36.068,18.034) 36.068,20.295 44.729,28.956 v1(59.055,28.956)
OUT+: J2.1 OUT+.1 U1.7 | length 70.7
  Top Layer w0.381: U1.7 60.249,21.997 60.472,21.774 60.472,21.189 v1(61.468,20.193) ; J2.1 92.075,64.442 92.884,63.633 92.884,41.99 OUT+.1 93.472,37.592 v1(92.964,37.084)
  Ground w0.381: v1(61.468,20.193) 76.073,20.193 v1(92.964,37.084)
OUT-: J2.2 OUT-.1 U1.10 | length 54.3
  Top Layer w0.381: U1.10 68.168,21.997 83.566,37.395 OUT-.1 84.074,42.418 84.074,57.839 87.249,61.013 87.249,65.024 J2.2
PHASE: PH.1 U1.3 U4.7 | length 29.5
  Top Layer w0.381: U4.7 37.211,33.401 PH.1 45.339,30.988 52.07,24.257 55.937,24.257 56.222,24.543 58.488,24.543 58.528,24.583 59.218,24.583 U1.3
POT_IN: J3.7A POT.1 U4.20 | length 49.8
  Top Layer w0.381: POT.1 16.637,41.783 U4.20 27.251,34.725 27.251,13.167 32.258,8.16 J3.7A
rev_pulse: H1.2 U4.5 | length 47.1
  Top Layer w0.381: H1.2 12.065,50.165 12.065,54.102 14.605,56.642 18.415,56.642 23.749,51.308 v1(23.749,45.847) ; v1(32.639,29.337) U4.5
  Ground w0.381: v1(23.749,45.847) 23.749,38.227 v1(32.639,29.337)
RGB_PWM: J3.11A RGB.1 U4.8 | length 38.8
  Top Layer w0.381: J3.11A 36.258,11.24 31.623,15.875 31.623,33.909 U4.8 40.005,35.941 RGB.1
SCL: J3.3A SCL.1 U4.24 | length 36.8
  Top Layer w0.381: SCL.1 U4.24 24.511,27.305 24.511,12.446 28.258,8.699 J3.3A
SDA: J3.5A SDA.1 U4.23 | length 40.8
  Top Layer w0.381: SDA.1 17.272,37.084 U4.23 25.908,28.448 25.908,13.335 30.258,8.985 J3.5A
VCC: H1.1 R11.1 VCC.1 | length 19.1
  Top Layer w0.381: R11.1 7.886,49.403 H1.1 8.763,62.23 VCC.1
pads on no net: D1.2 J3.1B J3.2B J3.3B J3.4B J3.5B J3.6B J3.7B J3.8B J3.9B J3.10B J3.11B J3.12B U1.13 U1.16 U1.17 U4.3 U4.13 U4.14 U4.15 U4.16 U4.17 U4.18 U4.19 U4.21 U4.22 U4.25 U4.26 U4.28

## Polygon pours and split planes (outlines as drawn)
GND on Ground "GND_L02_P000" (solid, remove dead copper, pour order 0): 0,69.088 99.949,69.088 99.949,0 0,0
GND on Top Layer "GND_L01_P001" (solid, remove dead copper, pour order 1): 0,69.088 99.949,69.088 99.949,0 0,0

## Silkscreen, mask and mechanical layers (free items; w line width, h text height)
Top Overlay:
  text "The Pole Man Mainboard" at 53.086,9.398 h1.52
  text "Designed by Abdullah Naeem" at 58.293,5.842 h1.52
Board Outline:
  the board outline again, w0.254

## Dimensions
0,69.088 to 0,0 on Mechanical 1
0,69.088 to 99.949,69.088 on Mechanical 1

## Text inside footprints (layer, text, board x,y; h text height)
H1: Top Overlay "1" at 9.398,44.958 h1.52 r90